# Altium PCB SensorV500.PcbDoc
Units mil, origin at the board's own origin, x right, y up, seen from the top; angles counter-clockwise.
Board outline 2215 x 1425 mil, 2 copper layers (Top Layer, Bottom Layer); 78 components, 101 nets, 341 pads, 99 vias.
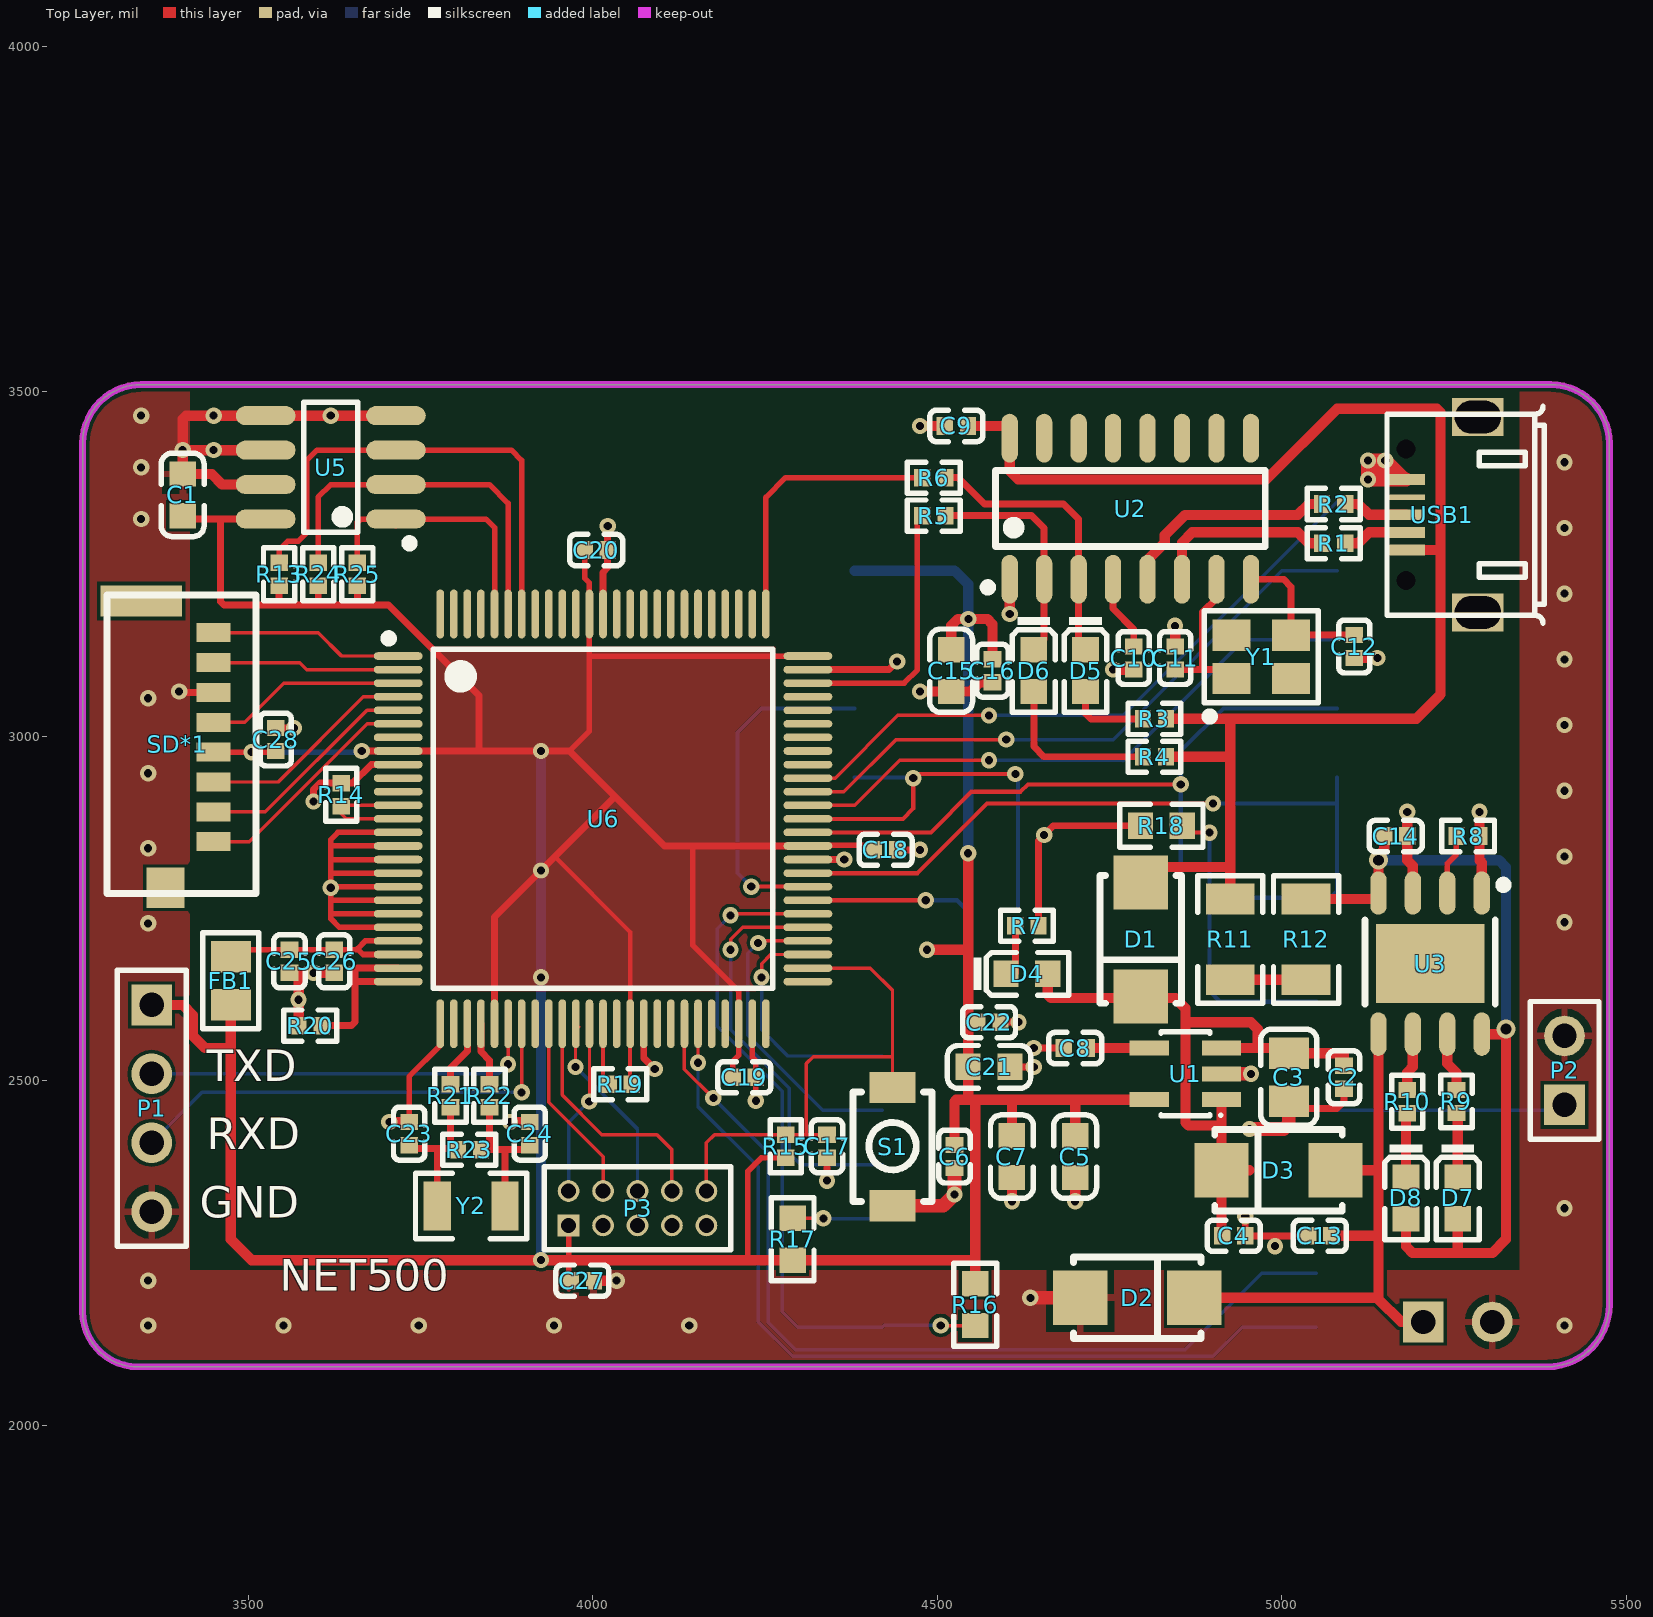
[diagram p0: Top Layer view]
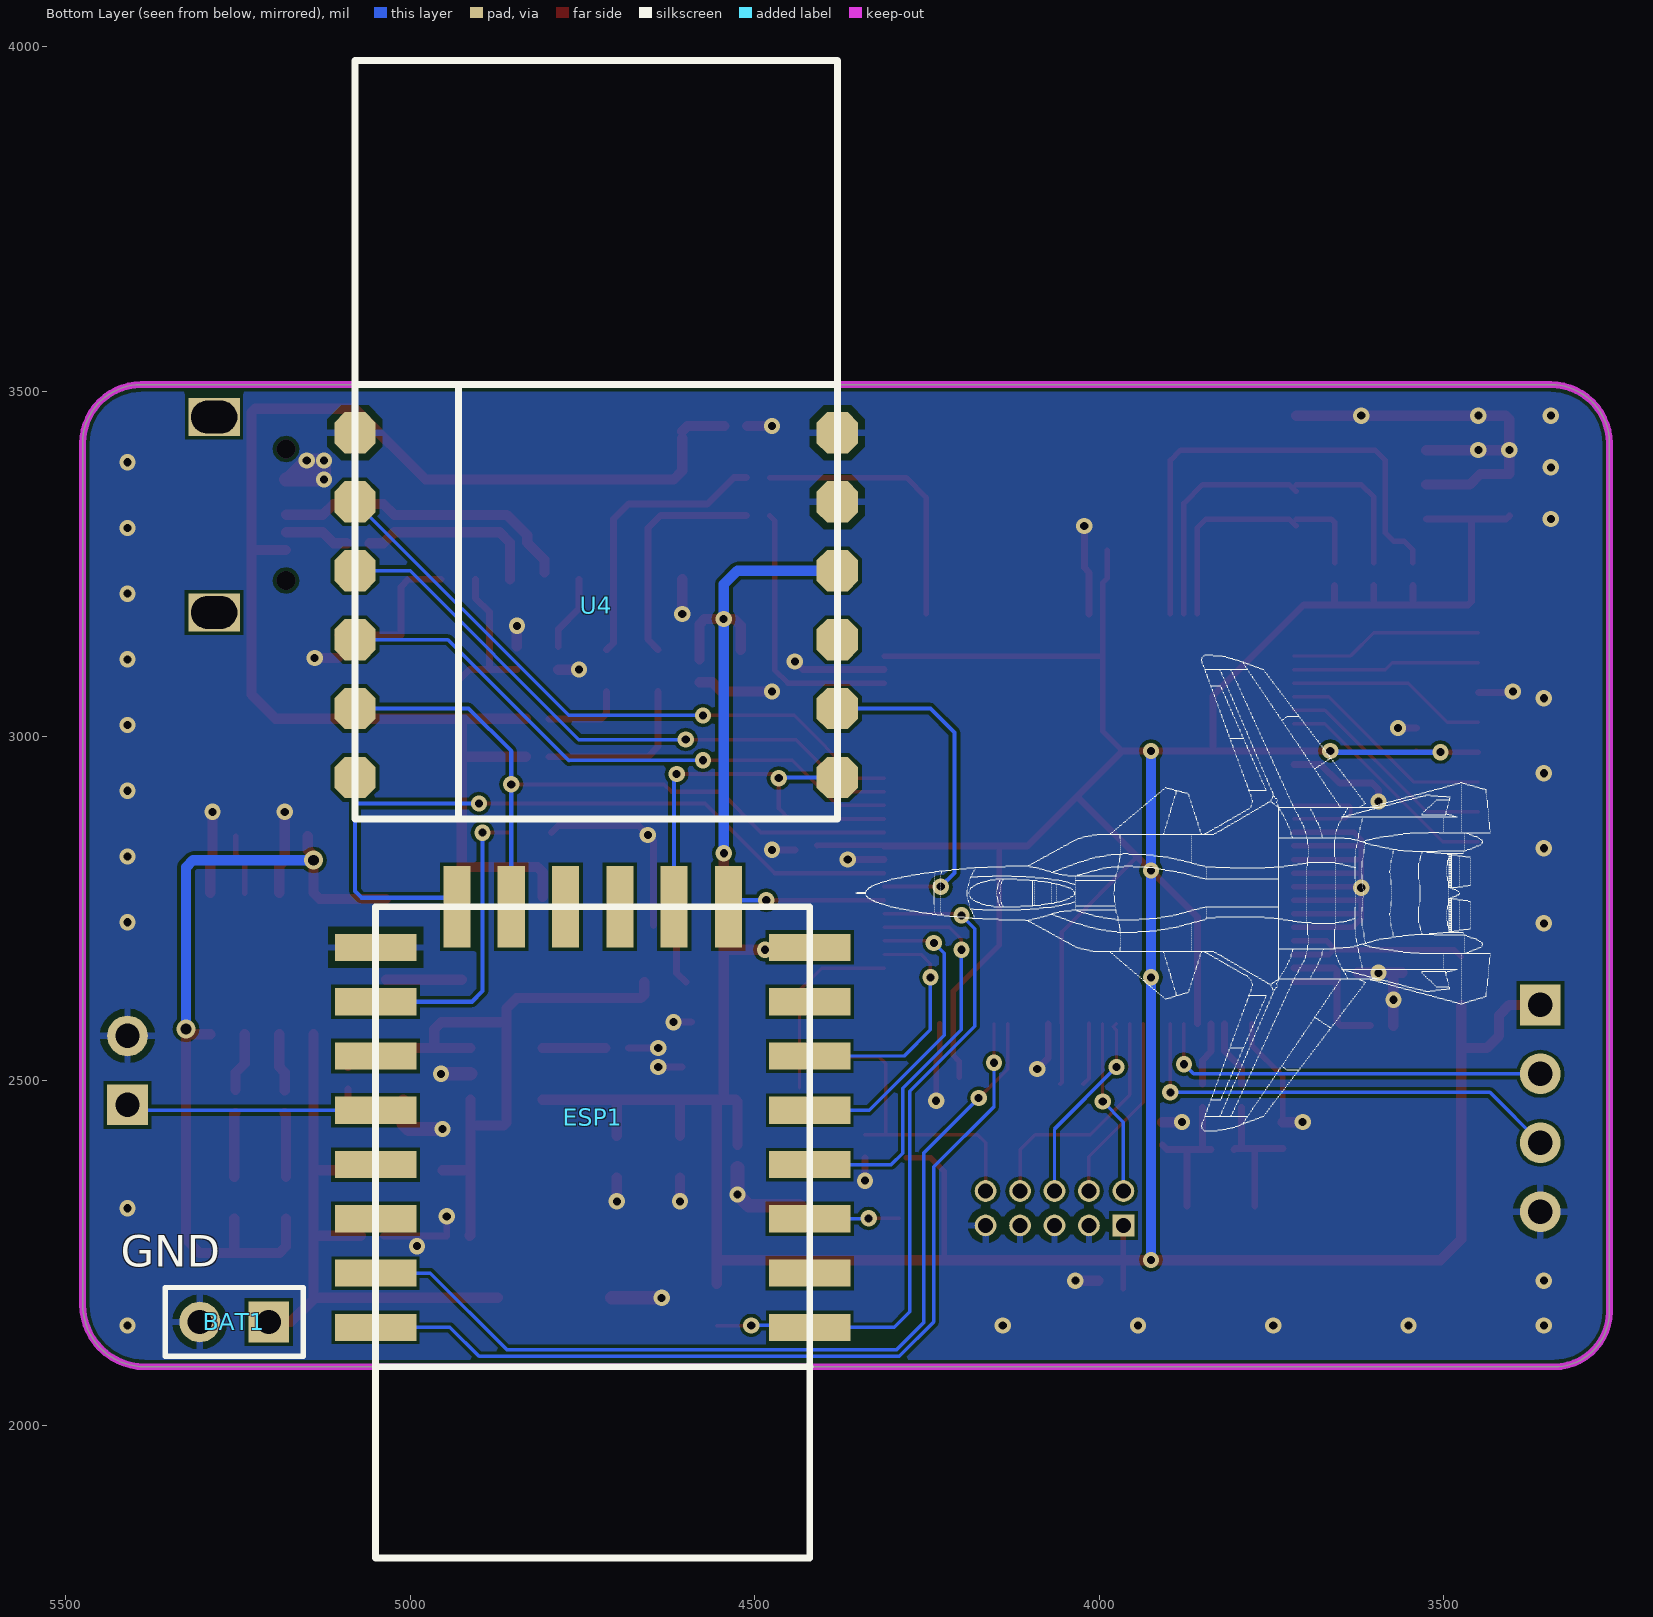
[diagram p1: Bottom Layer view, seen from below]

## Layer stack, top to bottom
Top Solder: solder mask 0.4, Solder Resist, Dk 3.5
Top Layer: signal copper 1.4
Dielectric 1: dielectric 12.6, FR-4, Dk 4.8
Bottom Layer: signal copper 1.4
Bottom Solder: solder mask 0.4, Solder Resist, Dk 3.5

## Board outline
3260,2165 ccw(c3340,2165) 3340,2085 5385,2085 ccw(c5385,2175) 5475,2175 5475,3425 ccw(c5390,3425) 5390,3510 3345,3510 ccw(c3345,3425) 3260,3425

## Design rules (kind name [scope] priority, off if disabled: settings)
Clearance [All] p1: gap=5 ignorepadtopadclearanceinfootprint=FALSE except(0: Arc-Hole Track-Hole SMDPad-Hole THPad-Hole Via-Hole Fill-Hole Poly-Hole Region-Hole Text-Hole; 10: Arc-Text Track-Text SMDPad-Text THPad-Text Via-Text Fill-Text Poly-Text Region-Text Text-Text)
DiffPairsRouting [All] p1: maxlimit=10 minlimit=10 mostfreqgap=10 toplayer_minwidth=15 toplayer_maxwidth=15 toplayer_prefwidth=15 bottomlayer_minwidth=15 bottomlayer_maxwidth=15 bottomlayer_prefwidth=15 maxuncoupledlength=500
PolygonConnect [All] p1: thpad.connectstyle=Relief thpad.reliefconductorwidth=10 thpad.reliefentries=4 thpad.polygonreliefangle="90 Angle" thpad.airgapwidth=10 smdpad.connectstyle=Relief smdpad.reliefconductorwidth=10 smdpad.reliefentries=4 smdpad.polygonreliefangle="90 Angle" smdpad.airgapwidth=10 via.connectstyle=Direct via.reliefconductorwidth=10 via.reliefentries=4 via.polygonreliefangle="90 Angle" via.airgapwidth=10
RoutingVias [All] p1: holewidth=28 width=50 viastyle="Through Hole" minholewidth=11.81 minwidth=23.62 maxholewidth=28 maxwidth=50
SolderMaskExpansion [All] p1: expansion=4
Width [All] p1: maxlimit=80 minlimit=5 preferedwidth=10 minimp=50.000000 maximp=50.000000 favimp=50.000000
29 further rules are at their usual default settings.

## Classes and differential pairs
differential pair USB: +USB_P -USB_N
differential pair USB0: +USB0_P -USB0_N

## Components (designator, comment, footprint, x,y, rotation, side; value= is the part's Value field where it differs from the comment)
BAT1 "Header 2" HDR1X2 5205,2150 r0 bottom
C1 "22uF (226) 20% 6.3V" 0603_C 3405,3350 r270 top
C2 "1.0uF (105) 10% 25V" 0402_C 5090,2505 r90 top
C3 "22uF (226) 20% 25V" 0805_C 5010,2505 r90 top
C4 "10nF (103) 10% 50V" 0402_C 4930,2275 r180 top
C5 "2.2uF (225) 10% 16V" 0603_C 4700,2390 r270 top
C6 "10nF (103) 10% 50V" 0402_C 4525,2390 r270 top
C7 "22uF (226) 20% 6.3V" 0603_C 4608.27,2390 r270 top
C8 "470pF (471) 10% 50V" 0402_C 4700,2547.4 r180 top
C9 "4.7uF (475) 20% 10V" 0402_C 4527.64,3450 r0 top
C10 "1.0uF (105) 10% 25V" 0402_C 4785,3113.27 r90 top
C11 "22pF (220) 5% 50V" 0402_C 4845,3113.27 r270 top
C12 "22pF (220) 5% 50V" 0402_C 5105,3130 r90 top
C13 "10uF" 0402_C 5055,2275 r0 top
C14 "10uF" 0402_C 5165,2855 r180 top
C15 "22uF (226) 20% 6.3V" 0603_C 4520,3095 r270 top
C16 "100nF (104) 10% 16V" 0402_C 4580,3095 r90 top
C17 "100nF (104) 10% 16V" 0402_C 4340,2405 r90 top
C18 "100nF (104) 10% 16V" 0402_C 4425,2835 r180 top
C19 "100nF (104) 10% 16V" 0402_C 4220,2505 r180 top
C20 "100nF (104) 10% 16V" 0402_C 4005,3270 r180 top
C21 "22uF (226) 20% 6.3V" 0603_C 4575,2520 r180 top
C22 "100nF (104) 10% 16V" 0402_C 4575,2585 r180 top
C23 "12pF (120) 5% 50V" 0402_C 3733.58,2423.27 r270 top
C24 "12pF (120) 5% 50V" 0402_C 3908.58,2423.27 r270 top
C25 "100nF (104) 10% 16V" 0402_C 3560,2673.27 r270 top
C26 "10nF (103) 10% 50V" 0402_C 3625,2673.27 r270 top
C27 "100nF (104) 10% 16V" 0402_C 3985,2210 r180 top
C28 "100nF (104) 10% 16V" 0402_C 3540,2995 r90 top
D1 "SS54" SMA(DO-214AC)_S1 4795,2705 r90 top
D2 "M7" SMA(DO-214AC)_S1 4790,2185 r180 top
D3 "SS54" SMA(DO-214AC)_S1 4995,2370 r0 top
D4 "白灯 0603" 0603_LED_S1 4630,2655 r0 top
D5 "黄灯 0603" 0603_LED_S1 4715,3095 r270 top
D6 "绿灯 0603" 0603_LED_S1 4640,3095 r270 top
D7 "红灯 0603" 0603_LED_S1 5255,2330 r270 top
D8 "绿灯 0603" 0603_LED_S1 5180,2330 r270 top
ESP1 "ESP-12" ESP-12 4735,2280 r0 bottom locked
FB1 "600Ω ±25% 100MHz" 0805_L 3475,2645 r90 top
P1 "Header 4" HDR1X4 3360,2610 r270 top
P2 "Header 2" HDR1X2 5410,2465 r90 top
P3 "JTAG" MHDR2X5 3965,2290 r0 top
R1 "0Ω (0R0) ±1%" 0402_R 5075,3280 r180 top
R2 "0Ω (0R0) ±1%" 0402_R 5075,3336.77 r180 top
R3 "5.1KΩ (5101) ±1%" 0402_R 4815,3025 r0 top
R4 "5.1KΩ (5101) ±1%" 0402_R 4815,2970 r0 top
R5 "51Ω (51R0) ±1%" 0402_R 4495,3320 r0 top
R6 "51Ω (51R0) ±1%" 0402_R 4495,3375 r0 top
R7 "5.1KΩ (5101) ±1%" 0402_R 4630,2725 r0 top
R8 "1.2KΩ" 0402_R 5270,2855 r180 top
R9 "1KΩ" 0402_R 5253.27,2469.96 r270 top
R10 "1KΩ" 0402_R 5181.73,2469.69 r270 top
R11 "0.1Ω (R100) ±1%" 1206_R 4925,2705 r270 top
R12 "0.1Ω (R100) ±1%" 1206_R 5035,2705 r90 top
R13 "200KΩ (2003) ±1%" 0402_R 3545,3235 r270 top
R14 "10KΩ (1002) ±1%" 0402_R 3635,2915 r90 top
R15 "10KΩ (1002) ±1%" 0402_R 4280,2405 r270 top
R16 "10KΩ" 0603_R 4555,2175 r270 top
R17 "1KΩ" 0603_R 4290,2270 r90 top
R18 "1KΩ" 0603_R 4825,2870 r180 top
R19 "10KΩ (1002) ±1%" 0402_R 4040,2495 r180 top
R20 "0Ω (0R0) ±1%" 0402_R 3590,2580 r180 top
R21 "0Ω (0R0) ±1%" 0402_R 3793.58,2478.27 r90 top
R22 "0Ω (0R0) ±1%" 0402_R 3850.31,2478.27 r90 top
R23 "1MΩ (1004) ±1%" 0402_R 3821.1,2400 r0 top
R24 "10KΩ (1002) ±1%" 0402_R 3601.73,3235 r270 top
R25 "10KΩ (1002) ±1%" 0402_R 3658.58,3235 r270 top
S1 "SW-PB" "key 3*4*2" 4435,2405 r90 top
SD*1 "TF_card" TF卡座(短体) 3295,3205 r270 top
U1 "MIC5219" SOT-23-5 4860,2510 r90 top
U2 "CH340G" SOIC-16_150mil 4780,3330 r0 top
U3 "TP4056" SOP-8_EP_150mil 5215,2670 r180 top
U4 "MRF24J40" MRF24J40 5080,2880 r180 bottom locked
U5 "LM75B" LC-SOIC-8_150mil 3620,3390 r90 top
U6 "MK64FX512VLL12" LC-LQFP-100_14x14x05P 4015,2880 r270 top
USB1 "USB_5line" USB-MICRO-5P-2F 5180,3270 r270 top
Y1 "12MHZ 20PF 10PPM" SMD-3225_4P 4970,3115 r0 top
Y2 "32.768KHz ±20ppm 12.5pF" "SMD-3215_2P FC - 135" 3823.58,2318.27 r0 top

## Footprints (in the part's own frame and the unit in brackets; to place one, negate y for a bottom-side part, rotate by r counter-clockwise, add the part's x,y. Pads: shape width x height; smd on the part's side, far side on the other; paste and mask are expansions set on the pad)
0402_C [mm]
  rect 0.6x0.65 smd mask+0.051: 1(-0.425,0) 2(0.425,0)
  silkscreen extent -0.97,-0.58 0.97,0.58, body extent -0.48,-0.3 0.52,0.3, height 0.2
0402_R [mm]
  rect 0.6x0.65 smd mask+0.051: 1(-0.425,0) 2(0.425,0)
  silkscreen extent -0.97,-0.58 0.97,0.58, body extent -0.57,-0.27 0.58,0.28, height 0.41
0603_C [mm]
  rect 0.93x0.98 smd: 1(-0.77,0) 2(0.77,0)
  silkscreen extent -1.53,-0.79 1.54,0.79, body extent -0.8,-0.4 0.8,0.4, height 0.3
0603_LED_S1 [mm]
  rect 0.93x0.98 smd: A(0.77,0) K(-0.77,0)
  silkscreen extent -1.97,-0.79 1.54,0.79, body extent -0.8,-0.4 0.8,0.4, height 0.6
0603_R [mm]
  rect 0.93x0.98 smd: 1(-0.77,0) 2(0.77,0)
  silkscreen extent -1.53,-0.79 1.54,0.79, body extent -0.85,-0.4 0.85,0.4, height 0.56
0805_C [mm]
  rect 1.16x1.47 smd: 1(-0.89,0) 2(0.89,0)
  silkscreen extent -1.77,-1.04 1.77,1.04, body extent -1,-0.62 1,0.63, height 0.77
0805_L [mm]
  rect 1.16x1.47 smd: 1(-0.89,0) 2(0.89,0)
  silkscreen extent -1.77,-1.04 1.77,1.03, body extent -1.02,-0.64 1.03,0.64, height 0.6
1206_R [mm]
  rect 1.13x1.8 smd: 1(-1.49,0) 2(1.49,0)
  silkscreen extent -2.36,-1.2 2.35,1.2, body extent -1.7,-0.86 1.65,0.87, height 0.85
ESP-12 [mm]
  rect 3x1 smd: 1(-8,3.5) 2(-8,1.5) 3(-8,-0.5) 4(-8,-2.5) 5(-8,-4.5) 6(-8,-6.5) 7(-8,-8.5) 8(-8,-10.5) 15(8,-10.5) 16(8,-8.5) 17(8,-6.5) 18(8,-4.5) 19(8,-2.5) 20(8,-0.5) 21(8,1.5) 22(8,3.5)
  rect 1x3 smd: 9(-5,-12) 10(-3,-12) 11(-1,-12) 12(1,-12) 13(3,-12) 14(5,-12)
  silkscreen extent -8,-12 8,12
HDR1X2 [mm] "Connector; Header; 2 Position"
  rect 1.5x1.5 hole 0.9: 1(0,0)
  round 1.5 hole 0.9: 2(2.54,0)
  silkscreen extent -1.27,-1.27 3.81,1.27, body extent -1.27,-1.27 3.81,1.27, height 7.58
HDR1X4 [mm] "Connector; Header; 4 Position"
  rect 1.5x1.5 hole 0.9: 1(0,0)
  round 1.5 hole 0.9: 2(2.54,0) 3(5.08,0) 4(7.62,0)
  silkscreen extent -1.27,-1.27 8.89,1.27, body extent -1.27,-1.27 8.89,1.27, height 7.58
"key 3*4*2" [mm]
  rect 1.15x1.7 smd: 1(-2.191,0) 2(2.159,0)
  silkscreen extent -2.03,-1.45 2,1.45
LC-LQFP-100_14x14x05P [mm]
  oval 0.28x1.8 smd mask+0.051: 1(-6,-7.55) 2(-5.5,-7.55) 3(-5,-7.55) 4(-4.5,-7.55) 5(-4,-7.55) 6(-3.5,-7.55) 7(-3,-7.55) 8(-2.5,-7.55) 9(-2,-7.55) 10(-1.5,-7.55) 11(-1,-7.55) 12(-0.5,-7.55) 13(0,-7.55) 14(0.5,-7.55) 15(1,-7.55) 16(1.5,-7.55) 17(2,-7.55) 18(2.5,-7.55) 19(3,-7.55) 20(3.5,-7.55) 21(4,-7.55) 22(4.5,-7.55) 23(5,-7.55) 24(5.5,-7.55) 25(6,-7.55) 51(6,7.55) 52(5.5,7.55) 53(5,7.55) 54(4.5,7.55) 55(4,7.55) 56(3.5,7.55) 57(3,7.55) 58(2.5,7.55) 59(2,7.55) 60(1.5,7.55) 61(1,7.55) 62(0.5,7.55) 63(0,7.55) 64(-0.5,7.55) 65(-1,7.55) 66(-1.5,7.55) 67(-2,7.55) 68(-2.5,7.55) 69(-3,7.55) 70(-3.5,7.55) 71(-4,7.55) 72(-4.5,7.55) 73(-5,7.55) 74(-5.5,7.55) 75(-6,7.55)
  oval 1.8x0.28 smd mask+0.051: 26(7.55,-6) 27(7.55,-5.5) 28(7.55,-5) 29(7.55,-4.5) 30(7.55,-4) 31(7.55,-3.5) 32(7.55,-3) 33(7.55,-2.5) 34(7.55,-2) 35(7.55,-1.5) 36(7.55,-1) 37(7.55,-0.5) 38(7.55,0) 39(7.55,0.5) 40(7.55,1) 41(7.55,1.5) 42(7.55,2) 43(7.55,2.5) 44(7.55,3) 45(7.55,3.5) 46(7.55,4) 47(7.55,4.5) 48(7.55,5) 49(7.55,5.5) 50(7.55,6) 76(-7.55,6) 77(-7.55,5.5) 78(-7.55,5) 79(-7.55,4.5) 80(-7.55,4) 81(-7.55,3.5) 82(-7.55,3) 83(-7.55,2.5) 84(-7.55,2) 85(-7.55,1.5) 86(-7.55,1) 87(-7.55,0.5) 88(-7.55,0) 89(-7.55,-0.5) 90(-7.55,-1) 91(-7.55,-1.5) 92(-7.55,-2) 93(-7.55,-2.5) 94(-7.55,-3) 95(-7.55,-3.5) 96(-7.55,-4) 97(-7.55,-4.5) 98(-7.55,-5) 99(-7.55,-5.5) 100(-7.55,-6)
  silkscreen extent -6.8,-8.05 6.25,6.25
LC-SOIC-8_150mil [mm]
  oval 0.7x2.2 smd: 1(-1.905,-2.4) 2(-0.635,-2.4) 3(0.635,-2.4) 4(1.905,-2.4) 5(1.905,2.4) 6(0.635,2.4) 7(-0.635,2.4) 8(-1.905,2.4)
  silkscreen extent -2.95,-3.05 2.4,1
MHDR2X5 [mm] "Connector; Header; 5x2 Position"
  rect 0.8x0.8 hole 0.55: 1(0,0)
  round 0.8 hole 0.55: 2(0,1.27) 3(1.27,0) 4(1.27,1.27) 5(2.54,0) 6(2.54,1.27) 7(3.81,0) 8(3.81,1.27) 9(5.08,0) 10(5.08,1.27)
  silkscreen extent -0.9,-0.9 5.98,2.17
MRF24J40 [mil]
  oct 60x60 smd: 1(0,560) 2(0,460) 3(0,360) 4(0,260) 5(0,160) 6(0,60) 7(700,60) 8(700,160) 9(700,260) 10(700,360) 11(700,460) 12(700,560)
  silkscreen extent 0,0 700,1100
SMA(DO-214AC)_S1 [mm]
  rect 2x2 smd: 1(2.1,0) 2(-2.1,0)
  silkscreen extent -2.35,-1.5 2.35,1.5
"SMD-3215_2P FC - 135" [mm]
  rect 1x1.8 smd: 1(-1.25,0) 2(1.25,0)
  silkscreen extent -2.05,-1.2 2.05,1.2
SMD-3225_4P [mm]
  rect 1.4x1.15 smd: 1(-1.1,-0.8) 2(1.1,-0.8) 3(1.1,0.8) 4(-1.1,0.8)
  silkscreen extent -2.1,-2.35 2.1,1.7, body extent -1.6,-1.25 1.6,1.25, height 0.61
SOIC-16_150mil [mm]
  oval 0.6x1.8 smd: 1(-4.445,-2.6) 2(-3.175,-2.6) 3(-1.905,-2.6) 4(-0.635,-2.6) 5(0.635,-2.6) 6(1.905,-2.6) 7(3.175,-2.6) 8(4.445,-2.6) 9(4.445,2.6) 10(3.175,2.6) 11(1.905,2.6) 12(0.635,2.6) 13(-0.635,2.6) 14(-1.905,2.6) 15(-3.175,2.6) 16(-4.445,2.6)
  silkscreen extent -5.4,-3.05 4.97,1.4, body extent -4.95,-2.97 4.95,3.03, height 1.75
SOP-8_EP_150mil [mm]
  rect 4x2.9 smd: 0(0,0)
  oval 0.6x1.6 smd: 1(-1.905,-2.6) 2(-0.635,-2.6) 3(0.635,-2.6) 4(1.905,-2.6) 5(1.905,2.6) 6(0.635,2.6) 7(-0.635,2.6) 8(-1.905,2.6)
  silkscreen extent -2.85,-3.05 2.4,1.5
SOT-23-5 [mm] "SOT-23/SC-74A; 5 Leads; Body 3.1 x 3 mm, inc. leads (LxW max)"
  rect 0.55x1.45 smd: 1(-0.95,-1.329) 2(0,-1.329) 3(0.95,-1.329) 4(0.95,1.329) 5(-0.95,1.329)
  silkscreen extent -1.57,-1.35 1.55,0.9
TF卡座(短体) [mm]
  rect 1.15x3 smd: 0(0.227,1.27)
  rect 1.48x1.4 smd: 0(10.795,2.159)
  rect 0.7x1.25 smd: 1(9.097,3.937) 2(7.997,3.937) 3(6.897,3.937) 4(5.797,3.937) 5(4.697,3.937) 6(3.597,3.937) 7(2.497,3.937) 8(1.397,3.937)
  silkscreen extent 0,0 11,5.5
USB-MICRO-5P-2F [mm]
  round 0 hole 0.7: 0(-3.725,0) 0(1.125,0)
  rect 0.4x1.4 smd: 1(0,0) 2(-0.65,0) 3(-1.3,0) 5(-2.6,0)
  rect 0.2x1.4 smd: 4(-1.95,0)
  rect 1.4x1.9 hole 1.2 slot 1.7 at 90 deg: 6(2.3,2.65) 7(-4.9,2.65)
  silkscreen extent -5.3,-0.7 2.7,5.1

## Part data
BAT1 P2: "Header, 2-Pin", LatestRevisionDate=17-Jul-2002, LatestRevisionNote="Re-released for DXP Platform.", Publisher="Altium Limited"
C1 C7 C15 C21: library part "0603 22uF (226) 20% 6.3V", "贴片电容", Package=0603, SuppliersPartNumber=C59461, ComponentLink1URL=http://www.szlcsc.com/product/details_60514.html, Supplier=LC
  C1 C15 C21: ComponentLink1Description=供应商
  C7: ComponentLink1Description=供应商链接
C2 C10: library part "0402 1.0uF (105) 10% 25V", "贴片电容", Package=0402, SuppliersPartNumber=C52923, ComponentLink1Description=供应商链接, ComponentLink1URL=http://www.szlcsc.com/product/details_53938.html, Supplier=LC
C3: library part "0805 22uF (226) 20% 25V", "贴片电容", Package=0805, SuppliersPartNumber=C45783, ComponentLink1Description=供应商链接, ComponentLink1URL=http://www.szlcsc.com/product/details_46786.html, Supplier=LC
C4 C6 C26: library part "0402 10nF (103) 10% 50V", "贴片电容", Package=0402, SuppliersPartNumber=C15195, ComponentLink1Description=供应商链接, ComponentLink1URL=http://www.szlcsc.com/product/details_15869.html, Supplier=LC
C5: library part "0603 2.2uF (225) 10% 16V", "贴片电容", Package=0603, SuppliersPartNumber=C23630, ComponentLink1Description=供应商链接, ComponentLink1URL=http://www.szlcsc.com/product/details_24366.html, Supplier=LC
C8: library part "0402 470pF (471) 10% 50V", "贴片电容", Package=0402, SuppliersPartNumber=C1537, ComponentLink1Description=供应商链接, ComponentLink1URL=http://www.szlcsc.com/product/details_1889.html, Supplier=LC
C9: library part "0402 4.7uF (475) 20% 10V", "贴片电容", Package=0402, SuppliersPartNumber=C23733, ComponentLink1Description=供应商链接, ComponentLink1URL=http://www.szlcsc.com/product/details_24469.html, Supplier=LC
C11 C12: library part "0402 22pF (220) 5% 50V", "贴片电容", Package=0402, SuppliersPartNumber=C1555, ComponentLink1Description=供应商链接, ComponentLink1URL=http://www.szlcsc.com/product/details_1907.html, Supplier=LC
C13 C14: library part "0402 10uF (106) 20% 6.3V", "贴片电容", Package=0402, SuppliersPartNumber=C15525, ComponentLink1Description=供应商, ComponentLink1URL=http://www.szlcsc.com/product/details_16204.html, Supplier=LC
C16 C17 C18 C19 C20 C22 C25 C27 C28: library part "0402 100nF (104) 10% 16V", "贴片电容", Package=0402, SuppliersPartNumber=C1525, ComponentLink1URL=http://www.szlcsc.com/product/details_1877.html, Supplier=LC
  C16 C17 C18 C19 C20 C22 C25: ComponentLink1Description=供应商链接
  C27 C28: ComponentLink1Description=供应商
C23 C24: library part "0402 12pF (120) 5% 50V", "贴片电容", Package=0402, SuppliersPartNumber=C1547, ComponentLink1Description=供应商链接, ComponentLink1URL=http://www.szlcsc.com/product/details_1899.html, Supplier=LC
D1 D3: library part "SMA(DO-214AC) SS54", "二极管", Package=SMA(DO-214AC), SuppliersPartNumber=C22452, ComponentLink1Description=供应商链接, ComponentLink1URL=http://www.szlcsc.com/product/details_23178.html, Supplier=LC
D2: library part "SMA(DO-214AC) M7", "二极管", Package=SMA(DO-214AC), SuppliersPartNumber=C95872, ComponentLink1Description=供应商链接, ComponentLink1URL=http://www.szlcsc.com/product/details_2841.html, Notepad="1N4007 4007 编号C2464 已经停售, 使用新物料编号C95872", Supplier=LC
D4: library part "0603 白灯", "发光二极管", Package=0603, SuppliersPartNumber=C2290, ComponentLink1Description=供应商链接, ComponentLink1URL=http://www.szlcsc.com/product/details_2663.html, Supplier=LC
D5: library part "0603 黄灯", "发光二极管", Package=0603, SuppliersPartNumber=C72038, ComponentLink1Description=供应商链接, ComponentLink1URL=http://www.szlcsc.com/product/details_73147.html, Supplier=LC
D6 D8: library part "0603 绿灯", "发光二极管", Package=0603, SuppliersPartNumber=C72043, ComponentLink1URL=http://www.szlcsc.com/product/details_73152.html, Supplier=LC
  D6: ComponentLink1Description=供应商链接
  D8: ComponentLink1Description=供应商
D7: library part "0603 红灯", "发光二极管", Package=0603, SuppliersPartNumber=C2286, ComponentLink1Description=供应商, ComponentLink1URL=http://www.szlcsc.com/product/details_2659.html, Supplier=LC
FB1: library part "0805 600Ω 25% 100MHz", "贴片磁珠", Package=0805, SuppliersPartNumber=C1017, ComponentLink1Description=供应商链接, ComponentLink1URL=http://www.szlcsc.com/product/details_1369.html, Supplier=LC
P1: "Header, 4-Pin", LatestRevisionDate=17-Jul-2002, LatestRevisionNote="Re-released for DXP Platform.", Publisher="Altium Limited"
P3: library part "Header 5X2", "Header, 5-Pin, Dual row", LatestRevisionDate=17-Jul-2002, LatestRevisionNote="Re-released for DXP Platform.", Publisher="Altium Limited"
R1 R2 R20 R21 R22: library part "0402 0Ω (0R0) 1%", "贴片电阻", Package=0402, SuppliersPartNumber=C17168, ComponentLink1Description=供应商链接, ComponentLink1URL=http://www.szlcsc.com/product/details_17853.html, Supplier=LC
R3 R4 R7: library part "0402 5.1KΩ (5101) 1%", "贴片电阻", Package=0402, SuppliersPartNumber=C25905, ComponentLink1Description=供应商链接, ComponentLink1URL=http://www.szlcsc.com/product/details_26648.html, Supplier=LC
R5 R6: library part "0402 51Ω (51R0) 1%", "贴片电阻", Package=0402, SuppliersPartNumber=C25125, ComponentLink1Description=供应商链接, ComponentLink1URL=http://www.szlcsc.com/product/details_25868.html, Supplier=LC
R8: library part "0402 1.2KΩ (1201) 1%", "贴片电阻", Package=0402, SuppliersPartNumber=C25862, ComponentLink1Description=供应商, ComponentLink1URL=http://www.szlcsc.com/product/details_26605.html, Supplier=LC
R9 R10: library part "0402 1KΩ (1001) 1%", "贴片电阻", Package=0402, SuppliersPartNumber=C11702, ComponentLink1Description=供应商, ComponentLink1URL=http://www.szlcsc.com/product/details_12256.html, Supplier=LC
R11 R12: library part "1206 0.1Ω (R100) 1%", "贴片电阻", Package=1206, SuppliersPartNumber=C25334, ComponentLink1Description=供应商链接, ComponentLink1URL=http://www.szlcsc.com/product/details_26077.html, Supplier=LC
R13: library part "0402 200KΩ (2003) 1%", "贴片电阻", Package=0402, SuppliersPartNumber=C25764, ComponentLink1Description=供应商链接, ComponentLink1URL=http://www.szlcsc.com/product/details_26507.html, Supplier=LC
R14 R15 R19 R24 R25: library part "0402 10KΩ (1002) 1%", "贴片电阻", Package=0402, SuppliersPartNumber=C25744, ComponentLink1URL=http://www.szlcsc.com/product/details_26487.html, Supplier=LC
  R14 R15 R19: ComponentLink1Description=供应商链接
  R24 R25: ComponentLink1Description=供应商
R16: library part "0603 10KΩ (1002) 1%", "贴片电阻", Package=0603, SuppliersPartNumber=C25804, ComponentLink1Description=供应商链接, ComponentLink1URL=http://www.szlcsc.com/product/details_26547.html, Supplier=LC
R17 R18: library part "0603 1KΩ (1001) 1%", "贴片电阻", Package=0603, SuppliersPartNumber=C21190, ComponentLink1Description=供应商链接, ComponentLink1URL=http://www.szlcsc.com/product/details_21904.html, Supplier=LC
R23: library part "0402 1MΩ (1004) 1%", "贴片电阻", Package=0402, SuppliersPartNumber=C26083, ComponentLink1Description=供应商链接, ComponentLink1URL=http://www.szlcsc.com/product/details_26826.html, Supplier=LC
S1: "Switch"
U1: "LDO"
U2: library part CH340G_[C14267], "USB", Package=SOIC-16_150mil, SuppliersPartNumber=C14267, ComponentLink1Description=供应商链接, ComponentLink1URL=http://www.szlcsc.com/product/details_14927.html, Supplier=LC
U3: library part TP4056_[C16581], "电池电源管理", Package=SOP-8_EP_150mil, SuppliersPartNumber=C16581, ComponentLink1Description=供应商, ComponentLink1URL=http://www.szlcsc.com/product/details_17264.html, Supplier=LC
Y1: library part "SMD-3225_4P  12MHZ 20PF 10PPM", "贴片晶振", Package=SMD-3225_4P, SuppliersPartNumber=C9002, ComponentLink1Description=供应商链接, ComponentLink1URL=http://www.szlcsc.com/product/details_9522.html, Supplier=LC
Y2: library part "SMD-3215_2P 32.768KHz 20ppm 12.5pF", "贴片晶振", Package=SMD-3215_2P, SuppliersPartNumber=C32346, ComponentLink1Description=供应商链接, ComponentLink1URL=http://www.szlcsc.com/product/details_33310.html, Supplier=LC

## Via types
v1: diameter 23.62, hole 11.81, Top Layer to Bottom Layer, tented both sides, 97 vias
v2: diameter 27.56, hole 15.75, Top Layer to Bottom Layer, tented both sides, 2 vias

## Nets (pads, with @x,y where several pads share a name; then routed paths per layer and width w, separated by ;. In a path a pad name is that pad's centre, name@x,y a point inside that pad or via, vN(x,y) a via of type N, cw(c..) or ccw(c..) an arc to the next point about the centre after c; other vN are vias at no path point)
3.3V: C1.2 C5.1 C6.1 C7.1 C15.1 C16.2 C18.2 C19.2 C20.2 C21.2 C22.2 C27.2 C28.1 ESP1.8 FB1.1 P1.1 P3.1 R13.2 R15.2 R16.1 R17.1 R19.1 R24.2 R25.2 SD*1.4 U1.5 U4.10 U5.8 U6.8 U6.30 U6.40 U6.48 U6.61 U6.75 U6.89 | length 8129.6
  Top Layer w6: 3945.01,2825.01 4054.37,2715.65 U6.40 4054.24,2582.63 4054.24,2497.49 R19.1
  Top Layer w8: SD*1.4 v1(3505,2976.77) 3538.5,2976.77 C28.1 ; C27.2@3965,2198.27 3965,2239.69 P3.1 ; 3966.57,2978.43 3995.32,3007.17 3995.32,3116.22 ; C20.2 3988.27,3229.37 3995.32,3222.32 U6.89 3995.32,3116.22 ; 4145,2840.63 4145,2696.73 4211.85,2629.88 U6.48 4211.85,2536.85 4203.27,2528.27 C19.2 ; 4225.18,2239.69 4225.18,2368.64 4244.8,2388.27 R15.2 ; R17.1@4289.69,2240 R17.1 ; U6.61 4313.37,2841.76 4407.77,2841.76 4408.9,2840.63 C18.2@4410,2841.73 ; U6.75 3995.32,3116.22
  Top Layer w10: C1.2 3409.68,3315 3460,3315 ; FB1.1 FB1.1 ; U5.8 3460,3315 ; R13.2 3545,3190 ; R24.2 3601.73,3191.73 3600,3190 ; R25.2 3658.58,3190 ; v1(3665,2978.43) U6.8 3835,2978.43 ; U6.30 3857.52,2737.52 v1(3925,2805) 3945.01,2825.01 4032.5,2912.5 ; U6.61 4145,2840.63 4104.37,2840.63 4032.5,2912.5 ; 3460,3315 3460,3195 3465,3190 3545,3190 ; 3545,3190 3600,3190 ; 3600,3190 3658.58,3190 ; 3658.58,3190 3703.78,3190 3835,3058.78 3835,2978.43 ; 3835,2978.43 v1(3925,2978.43) 3966.57,2978.43 4032.5,2912.5
  Top Layer w15: P1.1 3405,2610 3420,2595 3420,2565 3437.6,2547.4 3475,2547.4 ; FB1.1 3475,2547.4 ; v1(4485,2690) 4544.69,2690 ; C15.1 4520,3160 4530,3170 v1(4545,3170) 4572.29,3170 4580,3162.29 C16.2 ; C6.1 4525,2469.96 4527.64,2472.6 4545,2472.6 ; v1(4544.69,2830) 4544.69,2690 ; R16.1 4555,2240 ; C7.1 4608.27,2470.87 4610,2472.6 ; C5.1 4700,2472.6 ; U1.5 4700,2472.6 ; 3475,2547.4 3475,2269.96 3505.28,2239.69 3965,2239.69 4225.18,2239.69 R17.1 4554.69,2239.69 4555,2240 ; 4544.69,2690 4544.69,2545 4545,2544.68 4545,2472.6 ; 4545,2472.6 4555,2472.6 ; 4555,2240 4555,2472.6 ; 4555,2472.6 4610,2472.6 ; 4610,2472.6 4700,2472.6
  Bottom Layer w8: v1(3505,2976.77) 3663.35,2976.77 v1(3665,2978.43)
  Bottom Layer w15: v1(3925,2240) v1(3925,2650) v1(3925,2805) v1(3925,2978.43) ; U4.10 4525,3240 4544.69,3220.32 v1(4544.69,2830)
4V2: BAT1.1 C13.2 D2.2 D3.1 U3.5 | length 857.2
  Top Layer w15: D2.2 5135,2185 ; C13.2 5140,2275 ; D3.1@5077.01,2370 5138.82,2370 5140,2368.82 ; U3.5 5140,2368.82 ; BAT1.1 5173.27,2150 5140,2183.27 5140,2275 ; 5140,2275 5140,2368.82
AGND: R20.1 U6.24 U6.25 | length 253.7
  Top Layer w10: R20.1 3650,2580 3655,2585 3655,2640 ; U6.25 3658.78,2643.78 3655,2640 ; U6.24 3658.78,2663.46 3655,2659.69 3655,2640
AVDD: C25.1 C26.1 FB1.2 U6.22 U6.23 | length 315.6
  Top Layer w8: FB1.2 3484.96,2690 C25.1 C26.1 3660,2690 ; U6.23 3666.85,2683.15 3660,2690 ; U6.22 3670,2702.83 3658.58,2691.42 3660,2690
CH340_RXD: D5.K R6.2 U2.3 | length 411.9
  Top Layer w10: R6.2 4530,3375 4568.23,3336.77 4683.23,3336.77 4705,3315 U2.3 4705,3135.31 D5.K
CH340_TXD: D6.K R5.2 U2.2 | length 333.5
  Top Layer w10: R5.2 4636.73,3320 4655,3301.73 U2.2 4655,3140.31 D6.K
GND: BAT1.2 C1.1 C2.1 C3.1 C4.1 C5.2 C6.2 C7.2 C8.2 C9.1 C10.1 C11.1 C12.1 C13.1 C14.1 C15.2 C16.1 C17.1 C18.1 C19.1 C20.1 C21.1 C22.1 C23.1 C24.1 C25.2 C26.2 C27.1 C28.2 D2.1 ESP1.15 P1.4 P2.2 P3.3 P3.5 P3.7 P3.9 R7.2 R8.1 R14.2 R18.2 R20.2 S1.1 SD*1.6 U1.2 U2.1 U3.1 U3.3 U4.1 U4.11 U4.12 U5.4 U5.5 U5.6 U5.7 U6.9 U6.14 U6.15 U6.16 U6.17 U6.18 U6.19 U6.20 U6.21 U6.26 U6.41 U6.49 U6.60 U6.74 U6.88 USB1.5 | length 4531.3
  Top Layer w8: U6.21 3632.48,2722.52 3620,2735 3620,2745 ; U6.20 3622.8,2742.2 3620,2745 ; U6.19 3621.89,2761.89 3620,2760 ; U6.18 3621.57,2781.57 v1(3620,2780) ; U6.17 3621.26,2801.26 3620,2800 ; U6.16 3620.94,2820.94 3620,2820 ; U6.15 3620.63,2840.63 3620,2840 ; U6.14 3630.32,2860.32 3620,2850 3620,2840 ; C23.1 3733.58,2506 3778.78,2551.19 U6.26 ; U6.49 4231.54,2533.46 4236.73,2528.27 C19.1 v1(4236.73,2470.87) v1@4236.73,2470.47 ; 3620,2745 3620,2760 ; 3620,2760 v1(3620,2780) ; v1(3620,2780) 3620,2800 ; 3620,2800 3620,2820 ; 3620,2820 3620,2840
  Top Layer w10: v1(3400,3064.68) 3401.3,3063.39 SD*1.6 ; C28.2 v1(3566.73,3011.73) ; v1(3595,2905) 3595,2922.32 3604.41,2931.73 R14.2 3651.73,2931.73 3678.74,2958.74 U6.9 ; U6.88 4015,3237.64 4021.73,3244.37 C20.1 v1(4021.73,3305) ; U6.41 4074.06,2532.83 v1(4090,2516.89) ; U6.60 v1(4365,2820.94) ; U6.74 4429.84,3096.54 v1(4441.73,3108.43) ; v1(4340,2355) C17.1 ; C18.1 v1(4475,2835) ; C22.1 v1(4617.64,2585) ; C21.1 v1(4640,2520) ; v1(4640,2547.4) C8.2 ; R7.2 4646.73,2848.27 v1(4655,2856.54) 4668.46,2870 4784.68,2870 R18.2@4794.68,2860 ; v1(4946.73,2303.27) C4.1 4992.5,2275 ; v1(4990,2260) 4992.5,2262.5 4992.5,2275 ; C3.1 5019.96,2460 5080,2460 5090,2470 C2.1 ; C13.1 4992.5,2275
  Top Layer w15: U5.7 3462.36,3365 3447.05,3380.32 C1.1 v1(3405,3415) ; U5.6 v1(3450,3415) v1(3405,3415) ; C25.2 3575,2656.54 ; R20.2 v1(3573.27,2617.4) 3573.27,2654.8 3575,2656.54 ; C26.2 v1(3595,2656.54) 3575,2656.54 ; v1(3705,2440) C23.1 ; U5.4 v1(3620,3465) U5.5 v1(3450,3465) 3410,3465 3405,3460 v1(3405,3415) ; v1(3880,2440) C24.1 ; C27.1 v1(4034.68,2210) ; v1(4475,3064.68) C15.2 4547.95,3064.68 4561.54,3078.27 C16.1 ; v1(4475,3450) C9.1 ; v1(4605,3177.24) U2.1 ; v1(4608.27,2325) C7.2 ; v1(4700,2325) C5.2 ; v1(4755,3096.54) C10.1 ; C11.1 v1(4845,3160) ; C12.1 v1(5138.46,3113.27) ; v1(5181.73,2890.16) C14.1 5181.73,2820 5190,2811.73 U3.3 ; v1(5286.73,2890.16) R8.1 5286.73,2820 5290,2816.73 U3.1
  Top Layer w20: S1.1 4508.74,2318.74 v1(4525,2335) C6.2 ; v1(4635,2185) D2.1 ; U1.2 v1(4955,2510) ; v1(4952.99,2430) 5002.36,2430 5010,2437.64 C3.1 ; USB1.5 USB1.5@5177.64,3372.36 ; v1(5125,3372.36) v1@5150,3397.36 ; v1(5125,3372.36) 5145,3372.36 ; v1(5125,3372.36) v1(5125,3400) v1(5150,3400) ; 5145,3372.36 USB1.5@5177.64,3372.36 ; 5145,3372.36 5150,3377.36 v1@5150,3397.36 ; v1@5150,3397.36 v1(5150,3400) ; v1(5150,3400) USB1.5@5177.64,3372.36
  other v1: 3355,2145 3551.25,2145 3747.5,2145 3943.75,2145 4140,2145 5410,2145 3355,2210 5410,2315 3355,2728.4 5410,2730 5410,2825.34 3355,2837.26 5410,2920.67 3355,2946.13 5410,3016.01 3355,3055 5410,3111.35 5410,3206.69 5410,3302.02 3344.81,3315 3344.81,3390 5410,3397.36 3344.81,3465
I2C0_SCL: R24.1 U5.2 U6.95 | length 554
  Top Layer w8: R24.1 3601.73,3346.73 3620,3365 U5.2 ; U5.2@3714.49,3355 3724.49,3365 3850,3365 3877.2,3337.8 U6.95
I2C0_SDA: R25.1 U5.1 U6.96 | length 393.9
  Top Layer w8: R25.1 3658.58,3310.16 3663.43,3315 U5.1 ; U5.1@3714.49,3305 3724.49,3315 3845,3315 3857.52,3302.48 U6.96
JTAG_TCK: P3.4 U6.34 | length 275.4
  Top Layer w5: U6.34 3936.26,2468.74 4015,2390 P3.4
JTAG_TDI: P3.8 U6.35 | length 355.7
  Top Layer w5: U6.35 3955.69,2582.5 3955.69,2479.31 4013.27,2421.73 4093.27,2421.73 4115,2400 P3.8
JTAG_TDO: P3.6 U6.36 | length 283.9
  Top Layer w5: v1(3975,2520) 3975,2573.39 3980,2578.39 U6.36
  Bottom Layer w5: v1(3975,2520) 4065,2430 P3.6
JTAG_TMS: P3.2 U6.37 | length 255.2
  Top Layer w5: v1@3995.32,2470 U6.37
  Bottom Layer w5: P3.2 3965,2440 v1(3995,2470)
n_RST: C17.2 P3.10 R15.1 S1.2 U6.52 | length 759.7
  Top Layer w5: P3.10 4165,2410 4176.73,2421.73 R15.1 4310,2421.73 ; U6.52 4402.87,2663.46 4435,2631.34 4435,2535 ; C17.2 4310,2421.73 ; S1.2 4435,2535 ; 4310,2421.73 4310,2525 4320,2535 4435,2535
NetC8_1: C8.1 U1.4 | length 90.9
  Top Layer w15: C8.1 U1.4
NetC11_2: C11.2 U2.7 Y1.1 | length 226.5
  Top Layer w10: C11.2 4885,3096.54 ; U2.7 4905,3200 4885,3180 4885,3096.54 ; Y1.1 4913.66,3096.54 4885,3096.54
NetC12_2: C12.2 U2.8 Y1.3 | length 224.8
  Top Layer w10: U2.8 5002.36,3227.64 5013.31,3216.69 Y1.3 5104.76,3146.5 C12.2
NetC23_2: C23.2 R21.1 R23.1 Y2.1 | length 216.4
  Top Layer w10: C23.2@3733.58,2401.54 3775,2401.54 ; Y2.1 3774.37,2400.91 3775,2401.54 ; R21.1 3793.58,2405.12 3790,2401.54 ; R23.1 3802.83,2401.54 3790,2401.54 ; 3775,2401.54 3790,2401.54
NetC24_2: C24.2 R22.1 R23.2 Y2.2 | length 217.8
  Top Layer w10: R23.2 3850,2400 ; R22.1 3850.31,2400.31 3850,2400 ; Y2.2 3872.8,2397.8 3875,2400 ; C24.2 3902.05,2400 3875,2400 ; 3850,2400 3875,2400
NetD4_K: D4.K R7.1 | length 82.6
  Top Layer w10: D4.K@4599.69,2642.99 4613.27,2656.57 R7.1@4613.27,2720
NetD5_A: D5.A R3.1 | length 118.3
  Top Layer w10: D5.A 4715,3032.95 4722.95,3025 R3.1
NetD6_A: D6.A R4.1 | length 244.2
  Top Layer w10: D6.A 4640,2985 4655,2970 R4.1
NetD7_K: D7.K R9.2 | length 93.6
  Top Layer w15: R9.2 5255,2451.5 D7.K
NetD8_K: D8.K R10.2 | length 93.4
  Top Layer w15: D8.K 5180,2451.22 R10.2
NetESP1_3: ESP1.3 R17.2 | length 130.3
  Top Layer w5: R17.2 v1(4334.68,2300.32)
  Bottom Layer w5: v1(4334.68,2300.32) 4335.31,2299.68 ESP1.3
NetESP1_16: ESP1.16 R18.1 | length 431
  Top Layer w6: R18.1@4855.31,2860 v1(4895,2860)
  Bottom Layer w6: v1(4895,2860) 4895,2630 4910.35,2614.65 ESP1.16
NetESP1_18: ESP1.18 P2.1 | length 363.3
  Bottom Layer w5: ESP1.18 5402.17,2457.17 P2.1
NetR8_2: R8.2 U3.2 | length 88.1
  Top Layer w8: U3.2 5240,2815 5253.27,2828.27 R8.2
NetR9_1: R9.1 U3.7 | length 86.4
  Top Layer w15: U3.7 5240,2525 5253.27,2511.73 R9.1
NetR10_1: R10.1 U3.6 | length 84.6
  Top Layer w15: R10.1 5181.73,2511.73 5190,2520 U3.6
NetR11_2: R11.2 R12.1 | length 110
  Top Layer w15: R11.2 R12.1
NetR14_1: R14.1 U6.12 U6.13 | length 180
  Top Layer w5: U6.13 3642.48,2880 3635,2887.48 R14.1 3636.42,2899.68 U6.12
PTA4: R19.2 U6.38 | length 91.2
  Top Layer w6: U6.38 4015,2503.27 R19.2
PTA5: U6.39
PTA12: U6.42
PTA13: U6.43
PTA16: U6.46
PTA17: U6.47
PTA19: U6.51
PTB0: ESP1.6 U6.53 | length 359.4
  Top Layer w5: v1(4245,2650) 4245,2670 4258.15,2683.15 U6.53
  Bottom Layer w5: v1(4245,2650) 4245,2574.14 4283.24,2535.91 ESP1.6
PTB1: ESP1.5 U6.54 | length 453.7
  Top Layer w5: v1(4240,2700) 4242.83,2702.83 U6.54
  Bottom Layer w5: v1(4240,2700) 4225,2685 4225,2566.14 4333.98,2457.17 ESP1.5
PTB2: ESP1.4 U6.55 | length 606.6
  Top Layer w5: v1(4200,2690) 4200,2705 4217.52,2722.52 U6.55
  Bottom Layer w5: v1(4200,2690) 4200,2574.14 4285,2489.14 4285,2395 4301.57,2378.43 ESP1.4
PTB3: ESP1.1 R16.2 U6.56 | length 1026
  Top Layer w5: v1(4200,2740) 4202.2,2742.2 U6.56 ; v1(4505,2145) 4505.32,2144.68 R16.2
  Bottom Layer w5: v1(4200,2740) 4180.69,2720.69 4180.69,2579.31 4275,2485 4275,2165 4297.8,2142.2 ESP1.1 4422.83,2145 v1(4505,2145)
PTB18: U4.4 U6.64 | length 867.8
  Top Layer w5: U6.64 4380.31,2899.68 4445.63,2965 v1(4575,2965)
  Bottom Layer w5: v1(4575,2965) 4768.74,2965 4769.37,2964.37 4945,3140 U4.4
PTB19: U4.3 U6.65 | length 900.6
  Top Layer w5: U6.65 4364.37,2919.37 4440,2995 v1(4600,2995)
  Bottom Layer w5: v1(4600,2995) 4755,2995 5000,3240 U4.3
PTB20: U4.2 U6.66 | length 933.8
  Top Layer w5: U6.66 4351.93,2939.06 4442.87,3030 v1(4575,3030)
  Bottom Layer w5: v1(4575,3030) 4770,3030 U4.2
PTB21: U6.67
PTB22: U6.68
PTB23: U6.69
PTC0: U6.70
PTC1: U6.71
PTC2: U6.72
PTC5: U6.77
PTC6: U6.78
PTC7: U6.79
PTC8: U6.80
PTC9: U6.81
PTC10: U6.82
PTC11: U6.83
PTC12: U6.84
PTC13: U6.85
PTC14: U6.86
PTC15: U6.87
PTC16: U6.90
PTC17: U6.91
PTC18: U6.92
PTD0: U6.93
PTD1: R13.1 U5.3 U6.94 | length 720.7
  Top Layer w8: R13.1 3545,3270 3557.48,3282.48 3572.48,3282.48 3585,3295 3585,3400 3600,3415 U5.3 3881.89,3415 3896.89,3400 U6.94
PTD4: U6.97
PTD5: U6.98
PTD6: U6.99
PTD7: U6.100
PTE0: SD*1.8 U6.1 | length 281.7
  Top Layer w5: SD*1.8 3601.73,3150 3635.51,3116.22 U6.1
PTE1: SD*1.7 U6.2 | length 272
  Top Layer w5: SD*1.7 3574.84,3106.69 3585,3096.54 U6.2
PTE2: SD*1.5 U6.3 | length 291.3
  Top Layer w5: SD*1.5 3495.08,3020.08 3551.85,3076.85 U6.3
PTE3: SD*1.3 U6.4 | length 319
  Top Layer w5: SD*1.3 3543.46,2933.46 3667.17,3057.17 U6.4
PTE4: SD*1.2 U6.5 | length 328.8
  Top Layer w5: SD*1.2 3525.16,2890.16 3672.48,3037.48 U6.5
PTE5: SD*1.1 U6.6 | length 338.6
  Top Layer w5: SD*1.1 3501.85,2846.85 3672.8,3017.8 U6.6
PTE6: U6.7
PTE24: P1.2 U6.31 | length 581.8
  Top Layer w5: v1(3877.2,2523.94) U6.31
  Bottom Layer w5: P1.2 3863.27,2510 v1(3877.2,2523.94)
PTE25: P1.3 U6.32 | length 666.8
  Top Layer w5: v1(3896.89,2483.11) U6.32
  Bottom Layer w5: P1.3 3433.11,2483.11 v1(3896.89,2483.11)
PTE26: U6.33
RTCX1: R22.2 U6.29 | length 92.9
  Top Layer w10: U6.29 3837.83,2542.17 3850.31,2529.69 R22.2
RTCX2: R21.2 U6.28 | length 97.9
  Top Layer w10: R21.2 3793.58,2518.58 3818.15,2543.15 U6.28
SPI1_PCS0: U4.8 U6.58 | length 498.5
  Top Layer w6: v1(4230,2781.57) U6.58
  Bottom Layer w6: v1(4230,2781.57) 4210,2801.57 4210,3005 4245,3040 U4.8
SPI1_PCS1: ESP1.9 U6.57 | length 229.8
  Top Layer w6: U6.57 v1(4483.23,2761.89)
  Bottom Layer w6: v1(4483.23,2761.89) 4528.7,2761.89 ESP1.9
SPI1_SCK: ESP1.14 U4.6 U6.59 | length 1133.2
  Top Layer w6: U6.59 4312.37,2801.13 4471.13,2801.13 4572.29,2902.29 v1(4900,2902.29)
  Bottom Layer w6: v1(4900,2902.29) 5077.71,2902.29 5080,2900 ; ESP1.14 4945,2765.59 5070.59,2765.59 5080,2775 5080,2900 ; U4.6 5080,2900
SPI1_SIN: ESP1.10 U4.7 U6.63 | length 633.2
  Top Layer w6: U6.63 4450,2880 4465,2895 v1(4465,2939.06) 4470.94,2945 v1(4613.27,2945)
  Bottom Layer w6: U4.7 4464.06,2940 v1(4465,2939.06) ; v1(4613.27,2945) 4616.89,2941.38 ESP1.10
SPI1_SOUT: ESP1.13 U4.5 U6.62 | length 1047.9
  Top Layer w6: U6.62 4490.63,2860.32 4549.69,2919.37 4620.94,2919.37 4631.57,2930 v1(4853.11,2930)
  Bottom Layer w6: ESP1.13 v1(4853.11,2930) 4853.11,2978.11 4915,3040 U4.5
UART0_RX: ESP1.22 U6.45 | length 1317
  Top Layer w5: v1(4152.8,2526.14) U6.45
  Bottom Layer w5: v1(4152.8,2526.14) 4152.8,2462.2 4240,2375 4240,2150 4290,2100 4900,2100 4942.2,2142.2 ESP1.22
UART0_TX: ESP1.21 U6.44 | length 1341.2
  Top Layer w5: U6.44 4133.11,2516.89 v1(4175,2475)
  Bottom Layer w5: v1(4175,2475) 4255,2395 4255,2149.14 4294.14,2110 4860,2110 4970.94,2220.94 ESP1.21
UART1_RX: R5.1 U6.73 | length 393.7
  Top Layer w8: U6.73 4451.85,3076.85 4470.94,3095.94 4470.94,3312.68 R5.1
UART1_TX: R6.1 U6.76 | length 407.9
  Top Layer w8: U6.76 4251.22,3346.22 4280,3375 R6.1
USB0_N: R1.1 USB1.2 | length 94.7
  Top Layer w15: R1.1 5111.04,3280 5126.63,3295.59 USB1.2
USB0_P: R2.1 USB1.3 | length 94.7
  Top Layer w15: R2.1 5111.04,3336.77 5126.63,3321.18 USB1.3
USB_N: R1.2 U2.6 | length 269.3
  Top Layer w15: U2.6 4855,3280.89 4870,3295.89 5023.07,3295.89 5038.96,3280 R1.2
USB_P: R2.2 U2.5 | length 311.1
  Top Layer w15: U2.5@4805,3237.64 4805,3255.89 4830,3280.89 4830,3291.24 4859.64,3320.89 5023.07,3320.89 5038.96,3336.77 R2.2
V3: C10.2 U2.4 | length 110.1
  Top Layer w10: U2.4 4755,3185 4785,3155 C10.2
Vbus: C9.2 D1.1 R3.2 R4.2 R11.1 U2.16 USB1.1 | length 2165
  Top Layer w15: C9.2 4597.36,3450 U2.16@4605,3442.36 ; U2.16 4605,3385 4617.64,3372.36 4977.36,3372.36 5080,3475 5225,3475 5230,3470 5230,3060.3 5194.7,3025 4922.95,3025 ; D1.1@4807.68,2767.01 4807.68,2802.68 4815,2810 4925,2810 ; R4.2 4925,2970 ; R3.2 4922.95,3025 ; R11.1 4925,2810 ; USB1.1 5225,3270 ; 4922.95,3025 4925,3022.95 4925,2970 ; 4925,2810 4925,2970
VCC: C2.2 C3.2 C4.2 D1.2 D3.2 D4.A U1.1 U1.3 | length 1018.8
  Top Layer w15: D4.A@4660.32,2642.99 4660.32,2625 4665.32,2620 4845,2620 4860,2605 4860,2585 ; U1.1 4912.32,2435 ; U1.3 4965,2547.4 ; C4.2 4912.32,2275.94 D3.2 ; 4952.99,2370 D3.2 ; C2.2 5090,2538.27 5088.23,2540.04 C3.2 5002.64,2547.4 4965,2547.4 ; 4860,2585 4860,2440 4865,2435 4912.32,2435 ; 4860,2585 4955,2585 4965,2575 4965,2547.4 ; D3.2 4912.32,2435
VFIFT: C14.2 D7.A D8.A R12.2 U3.4 U3.8 | length 1208.7
  Top Layer w15: R12.2 5131.3,2763.66 U3.4 v2(5140,2820) 5140,2826.73 5148.27,2835 C14.2 ; D8.A 5180,2260 5190,2250 5255,2250 ; D7.A 5255,2250 ; U3.8 5317.64,2567.64 v2(5325,2575) 5325,2270 5305,2250 5255,2250
  Bottom Layer w15: v2(5140,2820) 5315,2820 5325,2810 v2(5325,2575)
pads on no net: ESP1.2 ESP1.7 ESP1.11 ESP1.12 ESP1.17 ESP1.19 ESP1.20 SD*1.0 U2.9 U2.10 U2.11 U2.12 U2.13 U2.14 U2.15 U3.0 U4.9 U6.10 U6.11 U6.27 U6.50 USB1.0 USB1.4 USB1.6 USB1.7 Y1.2 Y1.4

## Polygon pours and split planes (outlines as drawn)
GND on Top Layer "GND_L01_P008" (solid, remove dead copper, pour order 8): 5475,2085 5475,3510 5345,3510 5345,2085
GND on Top Layer "GND_L01_P006" (solid, remove dead copper, pour order 6): 3265,2145 3415,2144.7 3415,3510 3260,3510
GND on Top Layer "GND_L01_P004" (solid, remove dead copper, pour order 4): 3260,2085 5475,2085 5475,2225 3260,2225
3.3V on Top Layer "3.3V_L01_P000" (solid, remove dead copper, pour order 0): 3764.68,3130 4265,3130 4265,2629.86 3776.34,2630 3765.3,2641.03
GND on Bottom Layer "GND_L02_P002" (solid, remove dead copper, pour order 2): 3260,3510 3260,2085 5475,2085 5475,3510

## Keep-outs
Keep-Out Layer:
  the board outline again, w10

## Silkscreen, mask and mechanical layers (free items; w line width, h text height)
Top Overlay:
  text "TXD" at 3440,2483.74 h78.74
  text "RXD" at 3440,2385 h78.74
  text "GND" at 3430,2285.75 h78.74
  text "NET500" at 3546.02,2180 h78.74
Bottom Overlay:
  drawing of 6902 lines, arcs and shapes, not listed
  text "GND" at 5420,2215 h78.74